# Altium PCB Clock_Board v2.PcbDoc
Units mm, origin at the board's own origin, x right, y up, seen from the top; angles counter-clockwise.
Board outline 111.25 x 61.62 mm, 2 copper layers (Top Layer, Bottom Layer); 59 components, 69 nets, 267 pads, 0 vias.
Unrouted connection lines stored in the file: 4.
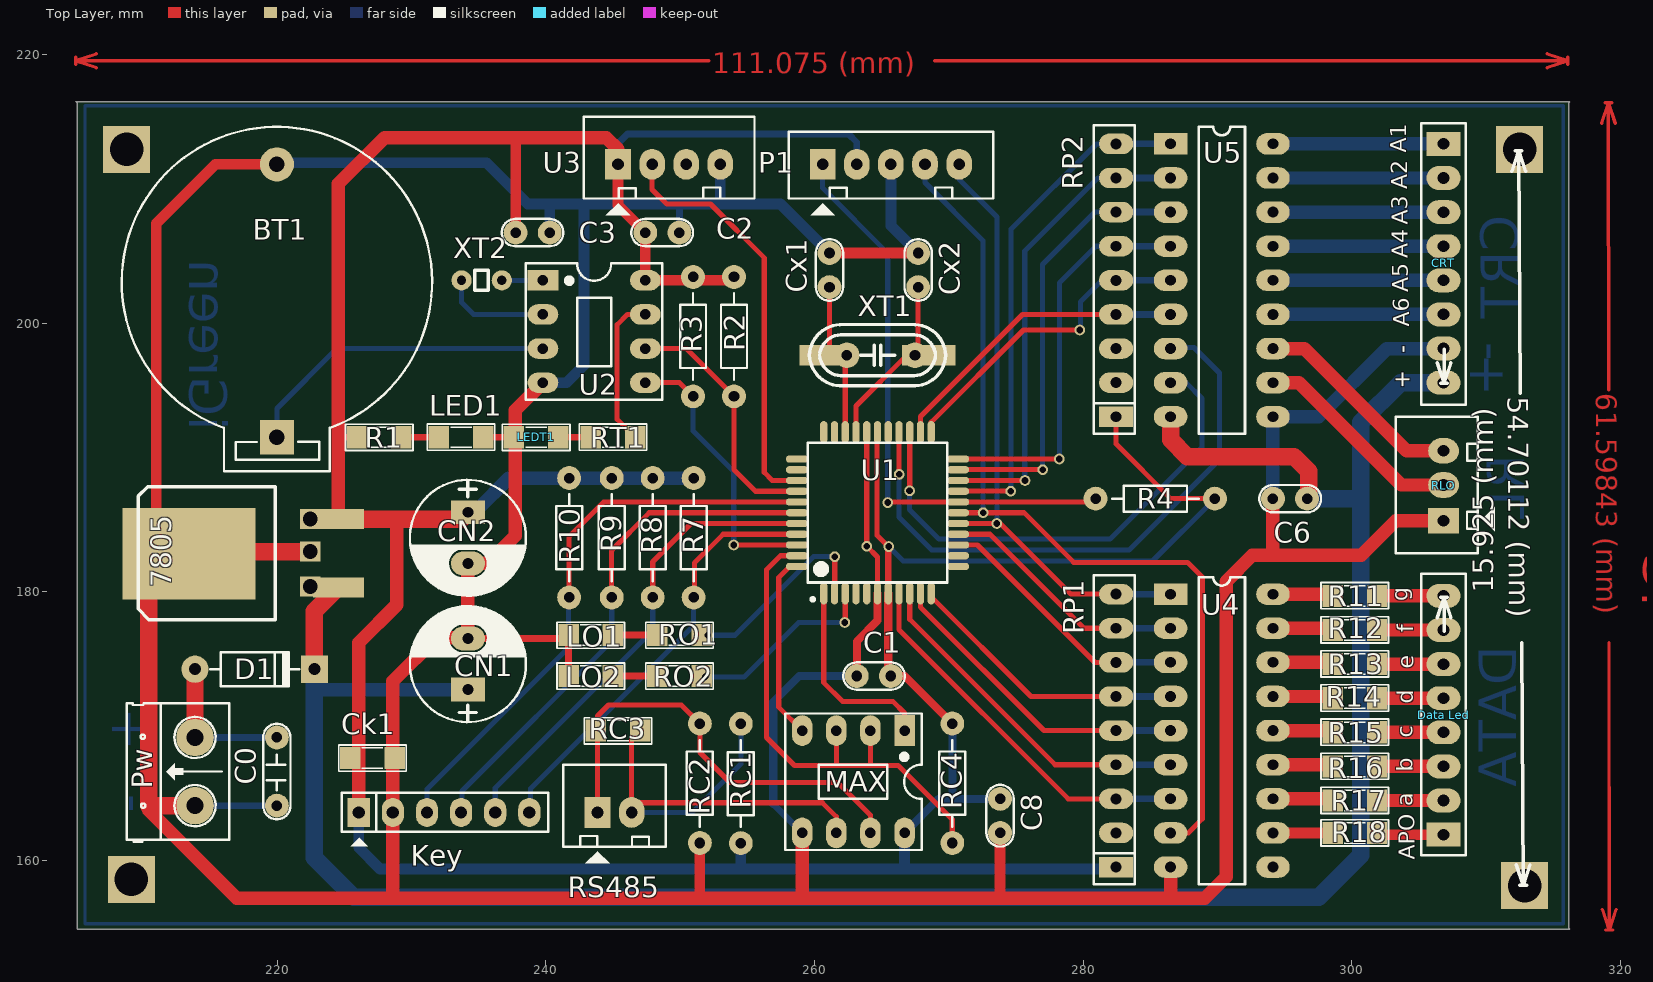
[diagram p0: Top Layer view]
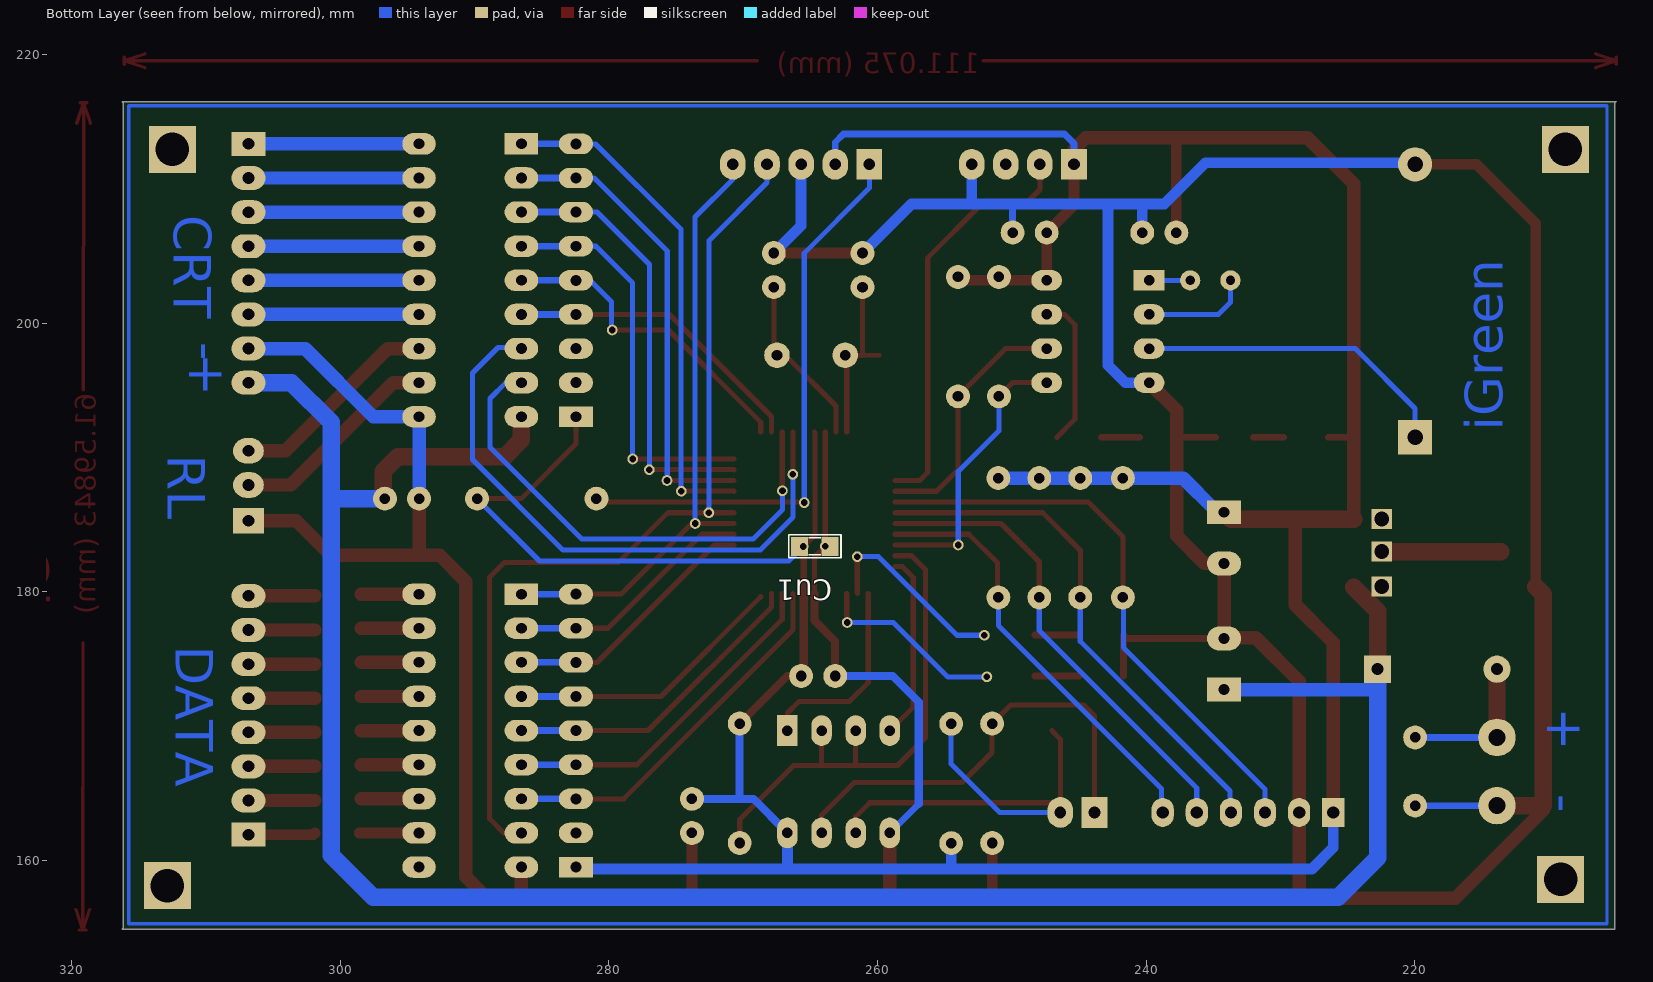
[diagram p1: Bottom Layer view, seen from below]
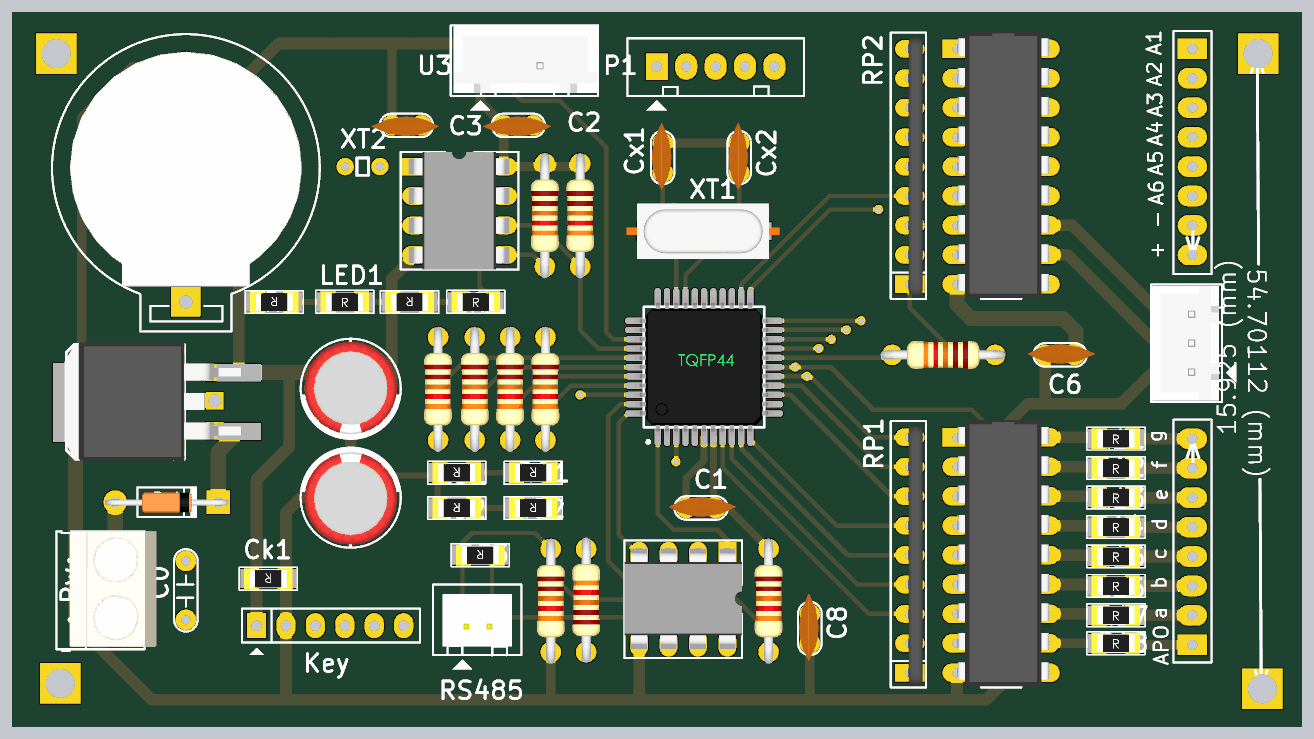
[diagram p2: 3D render of the assembled board from above, using the file's embedded part models]

## Layer stack, top to bottom
Top Layer: signal copper 0.0356
Dielectric: core 0.32, FR-4, Dk 4.8
Bottom Layer: signal copper 0.0356

## Board outline
205.25,216.5 316.25,216.5 316.175,216.425 316.175,177.875 316.175,154.95 316.25,154.875 303.25,154.875 205.1,154.875 205.1,174.85 205.1,216.4 205,216.5 206.525,216.5

## Design rules (kind name [scope] priority, off if disabled: settings)
AssemblyTestPointUsage AssemblyTestPointUsage_1 [All] p2:
AssemblyTestpoint AssemblyTestpoint_1 [All] p2: testpointundercomponent=TRUE minsize=1.016 maxsize=2.54 preferedsize=1.524 minholesize=0 maxholesize=1.016 preferedholesize=0.813 testpointgrid=0.025 usegrid=TRUE gridtolerance=0 allowsidetop=TRUE allowsidebottom=TRUE
Clearance [All] p1: gap=0.2
ComponentClearance ComponentClearance_1 [All] p2: gap=0.254 collisioncheckmode=3 verticalgap=0.254 showdistances=FALSE
DiffPairsRouting DiffPairsRouting_1 [All] p2: maxlimit=0.254 minlimit=0.254 mostfreqgap=0.254 maxuncoupledlength=12.7
FabricationTestPointUsage TestPointUsage [All] p2: valid=0 allowmultiple=FALSE
FabricationTestpoint Testpoint [All] p2: side=3 testpointundercomponent=TRUE minsize=1.016 maxsize=2.54 preferedsize=1.524 minholesize=0 maxholesize=1.016 preferedholesize=0.813 testpointgrid=0.025 allowsidetop=TRUE allowsidebottom=TRUE usegrid=TRUE gridtolerance=0
FanoutControl Fanout_LCC [IsLCC] p1: bgadir=Out bgaviamode=Centered fanoutstyle=Auto fanoutdirection=Alternating viagrid=0.025 // Fanout_LCC (Default Rule)
FanoutControl Fanout_BGA [IsBGA] p2: bgadir=Out bgaviamode=Centered fanoutstyle=Auto fanoutdirection=Alternating viagrid=0.025 // Fanout_BGA (Default Rule)
FanoutControl Fanout_Small [(CompPinCount < 5)] p3: bgadir=Out bgaviamode=Centered fanoutstyle=Auto fanoutdirection=OutThenIn viagrid=0.025 // Fanout_Small (Default Rule)
FanoutControl Fanout_SOIC [IsSOIC] p4: bgadir=Out bgaviamode=Centered fanoutstyle=Auto fanoutdirection=Alternating viagrid=0.025 // Fanout_SOIC (Default Rule)
FanoutControl Fanout_BGA_1 [IsBGA] p6: bgadir=Out bgaviamode=Centered fanoutstyle=Auto fanoutdirection=Alternating viagrid=0.025 // Fanout_BGA (Default Rule)
FanoutControl Fanout_LCC_1 [IsLCC] p7: bgadir=Out bgaviamode=Centered fanoutstyle=Auto fanoutdirection=Alternating viagrid=0.025 // Fanout_LCC (Default Rule)
FanoutControl Fanout_SOIC_1 [IsSOIC] p8: bgadir=Out bgaviamode=Centered fanoutstyle=Auto fanoutdirection=Alternating viagrid=0.025 // Fanout_SOIC (Default Rule)
FanoutControl Fanout_Small_1 [(CompPinCount < 5)] p9: bgadir=Out bgaviamode=Centered fanoutstyle=Auto fanoutdirection=OutThenIn viagrid=0.025 // Fanout_Small (Default Rule)
FanoutControl Fanout_Default_1 [All] p10: bgadir=Out bgaviamode=Centered fanoutstyle=Auto fanoutdirection=Alternating viagrid=0.025 // Fanout_Default (Default Rule)
Height Height_1 [All] p2: minheight=0 maxheight=25.4 prefheight=12.7
HoleSize HoleSize_1 [All] p2: absolutevalues=TRUE maxlimit=2.54 minlimit=0.025 maxpercent=80.000 minpercent=20.000
HoleToHoleClearance HoleToHoleClearance_1 [All] p2: gap=0.254 allowstackedmicrovias=TRUE
LayerPairs LayerPairs_1 [All] p2: enforce=TRUE
MinimumSolderMaskSliver MinimumSolderMaskSliver_1 [All] p2: minsoldermaskwidth=0.254
NetAntennae NetAntennae_1 [All] p2: netantennaetolerance=0
PasteMaskExpansion PasteMaskExpansion_1 [All] p2: expansion=0
PlaneClearance PlaneClearance_1 [All] p2: clearance=0.508
PolygonConnect [All] p1: connectstyle=Relief reliefconductorwidth=0.254 reliefentries=4 polygonreliefangle="90 Angle"
PolygonConnect PolygonConnect_1 [All] p2: connectstyle=Relief reliefconductorwidth=0.254 reliefentries=4 polygonreliefangle="90 Angle"
RoutingPriority RoutingPriority_1 [All] p2: routingpriority=0
RoutingTopology RoutingTopology_1 [All] p2: topology=Shortest
RoutingVias [All] p1: holewidth=0.6 width=1 viastyle="Through Hole" minholewidth=0.711 minwidth=1.27 maxholewidth=0.711 maxwidth=1.27
ShortCircuit ShortCircuit_1 [All] p2: allowed=FALSE
SilkToSilkClearance SilkToSilkClearance_1 [All] p2: silktosilkclearance=0.254
SilkscreenOverComponentPads [All] p1: minsilkscreentomaskgap=0.254
SilkscreenOverComponentPads SilkscreenOverComponentPads_1 [All] p2: minsilkscreentomaskgap=0.254
SolderMaskExpansion [All] p1: expansion=0.102
SolderMaskExpansion SolderMaskExpansion_1 [All] p2: expansion=0.102
UnRoutedNet UnRoutedNet_1 [All] p2:
Width [All] p1: maxlimit=3 minlimit=0.38 preferedwidth=0.38
23 further rules are at their usual default settings.

## Components (designator, comment, footprint, x,y, rotation, side; value= is the part's Value field where it differs from the comment)
7805 "Volt Reg" TO-263 224.536,180.34 r90 top
BT1 "PIN 3V" PIN3V 219.964,191.516 r90 top
C0 "104" CN2 219.964,164.084 r90 top
C1 "104" CN1 263.144,173.736 r0 top
C2 "104" CN1 249.936,206.756 r180 top
C3 "104" CN1 240.284,206.756 r180 top
C6 "104" CN1 294.132,186.944 r0 top
C8 "104" CN1 273.812,162.052 r90 top
Ck1 "100pF" SM-1206 227.076,167.64 r180 top
CN1 "100uF/35V" CP1.5/3.4 234.188,172.72 r90 top
CN2 "100uF/35V" CP1.5/3.4 234.188,185.928 r270 top
CRT "HD8" HED8 306.832,213.36 r270 top
Cu1 "33pF" SM-0805 264.668,183.388 r0 bottom
Cx1 "22pF" CN1 261.112,202.692 r90 top
Cx2 "22pF" CN1 267.716,202.692 r90 top
D1 "Diode 1N4007" D1A 213.868,174.244 r180 top
"Data Led" "HD8" HED8 306.832,161.925 r90 top
Key "JP6 PIN" JP6 226.06,163.576 r0 top
LED1 "LED" SM-1206 233.68,191.516 r0 top
LEDT1 "LED" SM-1206 239.268,191.516 r180 top
LO1 "LED" SM-1206 243.332,176.784 r180 top
LO2 "LED" SM-1206 243.332,173.736 r180 top
MAX "MAX485CSA" DIP8/W0.3 266.7,169.672 r180 top (schematic designator MAX485)
P1 "JP5" CON5 260.604,211.836 r0 top
Pw "Jack 12v" HED2 213.868,164.084 r90 top
R1 "1k" SM-1206 227.584,191.516 r180 top
R2 "4.7k" R1/4W 254,194.564 r90 top
R3 "4.7k" R1/4W 250.952,194.564 r90 top
R4 "10K" R1/4W 280.924,186.944 r0 top
R7 "10k" R1/4W 250.996,179.586 r90 top
R8 "10k" R1/4W 247.948,179.586 r90 top
R9 "10k" R1/4W 244.9,179.586 r90 top
R10 "10k" R1/4W 241.727,179.586 r90 top
R11 "220R" SM-1206 300.228,179.705 r0 top
R12 "220R" SM-1206 300.228,177.165 r0 top
R13 "220R" SM-1206 300.228,174.625 r0 top
R14 "220R" SM-1206 300.228,172.085 r0 top
R15 "220R" SM-1206 300.228,169.545 r0 top
R16 "220R" SM-1206 300.228,167.005 r0 top
R17 "220R" SM-1206 300.228,164.465 r0 top
R18 "220R" SM-1206 300.228,162.052 r0 top
RC1 "560R" R1/4W 254.508,170.18 r270 top
RC2 "560R" R1/4W 251.46,161.305 r90 top
RC3 "120R" SM-1206 245.364,169.672 r180 top
RC4 "10K" R1/4W 270.256,161.305 r90 top
RLO "JP3" CON3 306.832,185.42 r90 top
RO1 "1k" SM-1206 249.936,176.784 r180 top
RO2 "1k" SM-1206 249.936,173.736 r180 top
RP1 "10K" RN8 282.448,159.512 r90 top
RP2 "10K" RN8 282.448,193.04 r90 top
RS485 "Header 2" CON2 243.84,163.576 r0 top
RT1 "470" SM-1206 244.983,191.516 r0 top
U1 "PIC887-TQFL" TQFP-44 264.668,185.928 r90 top
U2 "DS1307" DIP8/W0.3 239.776,203.2 r270 top
U3 "DHT11" CON4 245.364,211.836 r0 top
U4 "ULN2803" ULN2803 286.512,179.832 r0 top
U5 "TD62783" ULN2803 286.512,213.36 r0 top
XT1 "12MHz" Xtal_SMD 267.208,197.612 r0 top
XT2 "32.768kHz" tu_gom 235.712,203.2 r0 top

## Footprints (in the part's own frame and the unit in brackets; to place one, negate y for a bottom-side part, rotate by r counter-clockwise, add the part's x,y. Pads: shape width x height; smd on the part's side, far side on the other; paste and mask are expansions set on the pad)
CN1 [mil]
  round 70 hole 31: 1(0,0) 2(100,0)
  silkscreen extent -40,-40 141,40, body extent -60,-30 170,37, height 265
CN2 [mil]
  round 70 hole 31: 1(0,0) 2(200,0)
  silkscreen extent -40,-40 240,40
CON2 [mil] "CON2"
  rect 75x90 hole 34: 1(0,0)
  oval 75x90 hole 34: 2(100,0)
  silkscreen extent -100,-150 200,140, body extent -68,-70 168,107, height 236
CON3 [mil] "CON 3"
  rect 75x90 hole 34: 1(-5,0)
  oval 75x90 hole 34: 2(100,0) 3(200,0)
  silkscreen extent -100,-150 300,140, body extent -95,-90 295,136, height 276
CON4 [mil] "CON4"
  rect 75x90 hole 34: 1(0,0)
  oval 75x90 hole 34: 2(100,0) 3(200,0) 4(300,0)
  silkscreen extent -100,-150 400,140, body extent -90,-90 398,136, height 276
CON5 [mil] "CON5"
  rect 75x90 hole 34: 1(0,0)
  oval 75x90 hole 34: 2(100,0) 3(200,0) 4(300,0) 5(400,0)
  silkscreen extent -100,-150 500,96
CP1.5/3.4 [mil] "Tu hoa 220->470uF,16V, 470uF/16V,25V"
  rect 70x100 hole 32: 1(0,0)
  oval 70x100 hole 32: 2(150,0)
  silkscreen extent -95,-170 245,170, body extent -85,-157 230,157, height 446
D1A [mil] "Diode 1A, W 100mil, L 350mil"
  round 80 hole 35: 1(0,0)
  rect 80x80 hole 35: 2(-350,0)
  silkscreen extent -305,-50 -45,50, body extent -386,-33 34,36, height 84
DIP8/W0.3 [mil] "8 PIN, W 300mil, Pin to pin 100mil"
  rect 60x90 hole 31: 1(0,0)
  oval 60x90 hole 31: 2(100,0) 3(200,0) 4(300,0) 5(300,300) 6(200,300) 7(100,300) 8(0,300)
  silkscreen extent -50,-50 350,350, body extent -50,-40 350,336, height 201
HED2 [mil] "Header 2, 2 pin, hight 300mil, Pin to Pin 200, Colour Green"
  round 110 hole 50: 1(0,0) 2(200,0)
  silkscreen extent -106,-100 300,200, body extent -92,-140 302,155, height 394
HED8 [mil] "CON8"
  rect 70x100 hole 34: 1(0,0)
  oval 70x100 hole 34: 2(100,0) 3(200,0) 4(300,0) 5(400,0) 6(500,0) 7(600,0) 8(700,0)
  silkscreen extent -60,-65 765,65
JP6 [mil] "JP6"
  rect 65x85 hole 36: 1(0,0)
  oval 65x85 hole 36: 2(100,0) 3(200,0) 4(300,0) 5(400,0) 6(500,0)
  silkscreen extent -50,-99 556,58
PIN3V [mil] "Socket PIN 3V"
  rect 100x100 hole 45: 1(0,0)
  round 100 hole 45: 2(800,0)
  silkscreen extent -100,-455 910,455, body extent 53,-394 850,394, height 207
R1/4W [mil] "R 1/4W, 2 Pin, 350mil"
  round 70 hole 31: 1(0,0) 2(350,0)
  silkscreen extent 48,-38 302,38, body extent -40,-47 386,47, height 111
RN8 [mil] "R SIP8, 9 Pin"
  rect 60x100 hole 32: 1(0,0)
  oval 60x100 hole 32: 2(100,0) 3(200,0) 4(300,0) 5(400,0) 6(500,0) 7(600,0) 8(700,0) 9(800,0)
  silkscreen extent -50,-55 855,65, body extent -43,-44 843,5, height 259
SM-0805 [mil] "Compoment SMD 80x50mil"
  rect 50x55 smd: 1(-45,0) 2(45,0)
  silkscreen extent -77,-34 76,33, body extent -40,-25 40,25, height 24
SM-1206 [mil] "Compoment SMD 120x60mil"
  rect 60x65 smd: 1(-65,0) 2(65,0)
  silkscreen extent -99,-38 99,39, body extent -83,-35 83,36, height 25
TO-263 [mm] "SMD-DPAK"
  rect 1.5x3.8 smd: 1(0,0) 3(5.08,0)
  rect 6.8x9.9 smd: 2(2.5,11.1)
  silkscreen extent -2.4,4.7 7.5,14.9, body extent -2.5,-0.23 7.66,15.03
TQFP-44 [mm] "IC dan 44 chan"
  oval 1.65x0.55 smd: 1(-6.034,3.982) 2(-6.034,3.182) 3(-6.034,2.382) 4(-6.034,1.582) 5(-6.034,0.782) 6(-6.034,-0.018) 7(-6.034,-0.818) 8(-6.034,-1.618) 9(-6.034,-2.418) 10(-6.034,-3.218) 11(-6.034,-4.018) 23(5.966,-4.018) 24(5.966,-3.218) 25(5.966,-2.418) 26(5.966,-1.618) 27(5.966,-0.818) 28(5.966,-0.018) 29(5.966,0.782) 30(5.966,1.582) 31(5.966,2.382) 32(5.966,3.182) 33(5.966,3.982)
  oval 0.55x1.65 smd: 12(-4.034,-6.018) 13(-3.234,-6.018) 14(-2.434,-6.018) 15(-1.634,-6.018) 16(-0.834,-6.018) 17(-0.034,-6.018) 18(0.766,-6.018) 19(1.566,-6.018) 20(2.366,-6.018) 21(3.166,-6.018) 22(3.966,-6.018) 34(3.966,5.982) 35(3.166,5.982) 36(2.366,5.982) 37(1.566,5.982) 38(0.766,5.982) 39(-0.034,5.982) 40(-0.834,5.982) 41(-1.634,5.982) 42(-2.434,5.982) 43(-3.234,5.982) 44(-4.034,5.982)
  silkscreen extent -6.61,-5.22 5.17,5.18, body extent -6.03,-6.01 5.97,5.99, height 1.07
tu_gom [mm]
  round 1.5 hole 0.7: 1(-2,0) 2(1,0)
  silkscreen extent -1,-0.75 0,0.75
ULN2803 [mm]
  rect 2.5x1.6 hole 0.8: 1(0,0)
  oval 2.5x1.6 hole 0.8: 2(0,-2.54) 3(0,-5.08) 4(0,-7.62) 5(0,-10.16) 6(0,-12.7) 7(0,-15.24) 8(0,-17.78) 9(0,-20.32) 10(7.62,-20.32) 11(7.62,-17.78) 12(7.62,-15.24) 13(7.62,-12.7) 14(7.62,-10.16) 15(7.62,-7.62) 16(7.62,-5.08) 17(7.62,-2.54) 18(7.62,0)
  silkscreen extent 2.08,-21.59 5.54,1.27, body extent 0.06,-21.5 7.94,1.49, height 5.08
Xtal_SMD [mm] "Xtal Dan"
  rect 4x1.524 smd: 1(1.29,0.01) 2(-6.33,0.01)
  silkscreen extent -7.6,-2.28 2.56,2.3, body extent -9.2,-2.4 4,2.4, height 4.3

## Part data
7805: "Voltage Regulator"
BT1: "Battery 3VDC"
C0 C1 C2 C3 C6: library part CN2, "Cap np 104 => 105pF"
C8 Ck1: library part CN1, "Cap np  1pF - 472pF"
CN1 CN2: library part CP3, "Cap 100uF/35V - 470uF/16V"
CRT "Data Led": library part Hed8, "Hedear 8"
Cu1 Cx1 Cx2: library part CN0, "Cremic For Xtal 1pF => 100pF"
D1: "1 Amp General Purpose Rectifier"
Key: library part JP6
LED1 LEDT1 LO1 LO2: "LED Single colour Green and Red"
MAX: "Low-Power, Slew-Rate-Limited RS-485/RS-422 Transceiver"
P1: library part Con5, "Connector 5"
Pw: library part Hed2, "Header 2 (Green)"
R1 R2 R3 R4 R7 R8 R9 R10 R11 R12 R13 R14 R15 R16 R17 R18 RC1 RC2 RC3 RC4 RO1 RO2 RT1: library part R1/4W, "Resistor 1/4W"
RLO: library part Con3, "Connector 3"
RP1 RP2: library part "Header 9", "Header, 9-Pin"
RS485: "Header, 2-Pin"
U1: library part PIC16F887-TQFL, "16F887_TQFP"
U2: "64 X 8 Serial Real-Time Clock"
U3: "Sensor Ther"
U4: library part "ULN 2803"
U5: library part TD62783AF
XT1 XT2: library part XTAL, "Crystal Oscillator"

## Free pads (board coordinates)
  rect 1.5x1.5 hole 1.1: 0(222.45,185.425) 1(222.45,180.4) 2(222.45,183)
  round 0.8 hole 0.5: 0(251.85,173.675) 0(272.55,185.9) 1(252.036,176.773) 3(276.987,189.103) 3(278.228,189.894) 4(275.67,188.294) 5(274.6,187.5) 6(273.575,185.094) 7(266.3,188.75) 8(267.075,187.525) 9(265.45,186.65) 10(261.5,182.625) 11(262.25,177.725) 12(253.981,183.494) 13(265.525,183.375) 14(263.886,183.4) 15(279.75,199.5)
  round 1.9 hole 0.8: 2(262.402,197.622) 3(267.482,197.622)
  rect 3.5x3.5 hole 2.5: 8(208.775,212.95) 9(209.125,158.6) 10(312.875,158.125) 11(312.5,212.95)

## Nets (pads, with @x,y where several pads share a name; then routed paths per layer and width w, separated by ;. In a path a pad name is that pad's centre, name@x,y a point inside that pad or via, vN(x,y) a via of type N, cw(c..) or ccw(c..) an arc to the next point about the centre after c; other vN are vias at no path point)
+12V: 7805.1 C6.2 CN1.1 CRT.8 D1.2 pad.1@222.45,180.4 U5.9 | length 171.5
  Top Layer w1: C6.2 C6.2@296.8,187.072
  Top Layer w1.3: D1.2 222.758,178.562 7805.1 ; U5.9 286.512,191.313 287.75,190.075 295.7,190.075 296.8,188.975 C6.2@296.8,187.072
  Bottom Layer w1: 222.758,172.725 222.763,172.72 CN1.1 ; 300.469,186.944 300.675,187.15
  Bottom Layer w1.3: D1.2 222.758,172.725 222.758,160.217 225.7,157.275 297.55,157.275 300.675,160.4 300.675,187.15 300.675,192.625 303.63,195.58 CRT.8 ; C6.2 300.469,186.944
A1: CRT.1 U5.18 | length 12.7
  Bottom Layer w1: U5.18 CRT.1
A2: CRT.2 U5.17 | length 12.7
  Bottom Layer w1: U5.17 CRT.2
A3: CRT.3 U5.16 | length 12.7
  Bottom Layer w1: U5.16 CRT.3
A4: CRT.4 U5.15 | length 12.7
  Bottom Layer w1: U5.15 CRT.4
A5: CRT.5 U5.14 | length 12.7
  Bottom Layer w1: U5.14 CRT.5
A6: CRT.6 U5.13 | length 12.7
  Bottom Layer w1: U5.13 CRT.6
ANODE1: pad.5 RP2.9 U1.19 U5.1 | length 37.9
  Top Layer w0.38: U1.19 270.692,187.5 pad.5
  Bottom Layer w0.38: pad.5@274.625,187.5 274.625,207 280.985,213.36 RP2.9
  Bottom Layer w0.5: RP2.9 U5.1
ANODE2: pad.4 RP2.8 U1.20 U5.2 | length 35.2
  Top Layer w0.38: U1.20 pad.4
  Bottom Layer w0.38: pad.4 275.65,188.314 275.65,205.375 281.095,210.82 RP2.8
  Bottom Layer w0.5: RP2.8 U5.2
ANODE3: pad.3@276.987,189.103 RP2.7 U1.21 U5.3 | length 32.7
  Top Layer w0.3: pad.3@276.978,189.094 pad.3@276.987,189.103
  Top Layer w0.38: U1.21 270.695,189.103 pad.3@276.987,189.103
  Bottom Layer w0.38: pad.3@276.987,189.103 276.975,189.115 276.975,204.375 280.88,208.28 RP2.7
  Bottom Layer w0.5: RP2.7 U5.3
ANODE4: pad.3@278.228,189.894 RP2.6 U1.22 U5.4 | length 30.1
  Top Layer w0.38: U1.22 pad.3@278.228,189.894
  Bottom Layer w0.38: pad.3@278.228,189.894 278.228,203.003 280.965,205.74 RP2.6
  Bottom Layer w0.5: RP2.6 U5.4
ANODE5: pad.15 RP2.5 U1.23 U5.5 | length 24.8
  Top Layer w0.3: U1.23 U1.23@268.686,192.536
  Top Layer w0.38: U1.23 268.686,192.636 275.55,199.5 pad.15
  Bottom Layer w0.38: pad.15 279.8,199.55 279.8,201.6 281.4,203.2 RP2.5
  Bottom Layer w0.5: RP2.5 U5.5
ANODE6: RP2.4 U1.24 U5.6 | length 24
  Top Layer w0.3: U1.24 267.886,192.936
  Top Layer w0.38: U1.24 267.886,193.061 275.485,200.66 RP2.4
  Bottom Layer w0.5: RP2.4 U5.6
APM: P1.4 pad.0@272.55,185.9 U1.17 U4.8 | length 68.7
  Top Layer w0.38: U1.17 275.606,185.894 279.3,182.2 287.777,182.2 288.875,181.102 288.875,163.1 287.827,162.052 U4.8
  Bottom Layer w0.38: P1.4 268.224,210.476 272.55,206.15 pad.0@272.55,185.9
APMO: "Data Led.1" R18.2 | length 5
  Top Layer w0.8: R18.2 302.006,161.925 306.832,161.925
DATA: U1.36 U3.2 | length 31
  Top Layer w0.38: U3.2 247.904,209.971 249,208.875 252.25,208.875 256.25,204.875 256.25,188.9 256.85,188.3 258.68,188.3 U1.36
DI: MAX.4 U1.44 | length 13.8
  Top Layer w0.38: U1.44 258.155,181.894 257.336,181.075 257.336,171.416 MAX.4
DOWN: Key.5 R8.1 U1.40 | length 35.5
  Top Layer w0.38: R8.1 247.948,182.202 247.925,182.225 250.794,185.094 U1.40
  Bottom Layer w0.38: Key.5 236.22,165.395 247.948,177.123 R8.1
EN: MAX.2 MAX.3 RC4.1 U1.43 | length 38.5
  Top Layer w0.38: U1.43 257.469,182.694 256.425,181.65 256.425,169.15 258.5,167.075 261.65,167.075 ; MAX.3 261.62,167.105 261.65,167.075 ; MAX.2 264.16,167.115 264.2,167.075 ; RC4.1 270.256,163.044 266.225,167.075 264.2,167.075 ; 261.65,167.075 264.2,167.075
GND: 7805.2 BT1.2 C0.1 C1.1 C2.1 C3.1 C6.1 C8.1 Ck1.1 CN1.2 CN2.2 CRT.7 Cu1.1 Cx1.2 Cx2.2 Key.2 LED1.2 LEDT1.2 LO1.2 LO2.2 MAX.5 P1.3 pad.2@222.45,183 pad.8@208.775,212.95 pad.9@209.125,158.6 pad.10@312.875,158.125 pad.11@312.5,212.95 pad.14 Pw.1 RC2.1 RLO.1 U1.6 U1.29 U2.4 U3.4 U4.9 U5.10 | length 413.2
  Top Layer w0.38: U1.29 pad.14 264.686,182.6 U1.6
  Top Layer w0.5: CN1.2 241.427,176.53 LO1.2 LO2.2 ; LED1.2@234.823,191.516 LEDT1.2@237.109,191.516 ; 251.3,157.2 251.46,157.36 ; 259.08,157.22 259.1,157.2 ; 273.725,157.2 273.812,157.287
  Top Layer w0.6: C1.1 263.144,176.319 264.686,177.861 U1.6
  Top Layer w0.8: 7805.2@210.975,180.379 210.975,207.425 215.386,211.836 BT1.2 ; 7805.2 7805.2@213.596,183 ; 251.46,157.36 RC2.1 ; Cx1.2 Cx2.2 ; 273.812,157.287 C8.1
  Top Layer w1: 210.425,164.075 210.425,163.75 216.975,157.2 228.55,157.2 ; CN2.2@234.188,181.61 CN1.2 234.118,176.6 231.85,176.6 228.6,173.35 Key.2 228.6,157.25 228.55,157.2 ; CN2.2 235.668,182.118 237.725,184.175 237.725,193.529 U2.4 ; 259.08,157.22 MAX.5 ; 286.512,157.45 U4.9 ; C6.1 294.132,182.807 294.05,182.725 ; RLO.1 303.268,185.293 300.7,182.725 294.05,182.725 ; 228.55,157.2 251.3,157.2 259.1,157.2 273.725,157.2 289.05,157.2 290.65,158.8 290.65,180.775 292.6,182.725 294.05,182.725
  Top Layer w1.3: 210.425,164.075 210.434,164.084 Pw.1 ; 210.425,164.084 210.425,179.829 7805.2@210.975,180.379 ; 7805.2@213.596,183 pad.2@222.35,183
  Bottom Layer w0.5: Pw.1 C0.1 ; BT1.2@220.025,212.405 BT1.2@220.48,211.95 ; C2.1 249.936,208.736 ; 256.925,164.207 MAX.5
  Bottom Layer w0.6: 256.925,164.207 256.925,171.8 258.861,173.736 C1.1
  Bottom Layer w0.8: BT1.2@220.48,211.95 235.575,211.95 238.65,208.875 257.469,208.875 Cx1.2 ; U2.4 241.53,195.58 242.825,196.875 242.825,208.875 ; C3.1 240.284,208.816 ; 252.984,208.909 U3.4 ; P1.3 265.684,207.264 Cx2.2
  Bottom Layer w1: C6.1 U5.10 297.54,193.04 302.62,198.12 CRT.7
ICSPCLK: P1.5 pad.6 RP1.9 U1.16 U4.1 | length 45.9
  Top Layer w0.38: U1.16 pad.6 273.831,185.094 279.093,179.832 RP1.9
  Bottom Layer w0.38: P1.5 270.764,210.732 273.575,207.921 pad.6
  Bottom Layer w0.5: RP1.9 U4.1
LED_A: RP1.3 U1.8 U4.7 | length 28.1
  Top Layer w0.38: U1.8 266.286,177.189 278.883,164.592 RP1.3
  Bottom Layer w0.5: RP1.3 U4.7
LED_B: RP1.4 U1.9 U4.6 | length 25.8
  Top Layer w0.38: U1.9 267.086,177.964 277.918,167.132 RP1.4
  Bottom Layer w0.5: RP1.4 U4.6
LED_C: RP1.5 U1.10 U4.5 | length 23.5
  Top Layer w0.38: U1.10 267.886,178.864 277.078,169.672 RP1.5
  Bottom Layer w0.5: RP1.5 U4.5
LED_D: RP1.6 U1.11 U4.4 | length 20.9
  Top Layer w0.38: U1.11@268.686,179.639 276.113,172.212 RP1.6
  Bottom Layer w0.5: RP1.6 U4.4
LED_E: RP1.7 U1.14 U4.3 | length 19.5
  Top Layer w0.3: RP1.7@282.4,174.752 RP1.7
  Top Layer w0.38: U1.14 272.131,183.494 280.873,174.752 RP1.7
  Bottom Layer w0.5: RP1.7 U4.3
LED_F: RP1.8 U1.15 U4.2 | length 18.7
  Top Layer w0.38: U1.15 273.056,184.294 280.058,177.292 RP1.8
  Bottom Layer w0.5: RP1.8 U4.2
LO1: pad.1@252.036,176.773 pad.10@261.5,182.625 RO1.1 U1.2 | length 14.6
  Top Layer w0.3: pad.10@261.486,182.611 pad.10@261.5,182.625
  Top Layer w0.38: U1.2 261.5,179.908 pad.10@261.5,182.625
  Bottom Layer w0.38: pad.1@252.036,176.773 254.073,176.773 259.925,182.625 pad.10@261.5,182.625
LO2: pad.0@251.85,173.675 pad.11@262.25,177.725 RO2.1 U1.3 | length 14.3
  Top Layer w0.3: pad.11@262.275,177.725 pad.11@262.286,177.736
  Top Layer w0.38: pad.11@262.286,177.736 U1.3
  Bottom Layer w0.38: pad.0@251.85,173.675 251.875,173.65 254.75,173.65 258.825,177.725 pad.11@262.25,177.725
MCLR: P1.1 pad.9@265.45,186.65 R4.1 U1.18 | length 42.8
  Top Layer w0.38: pad.9@265.45,186.65 265.494,186.694 U1.18 280.674,186.694 R4.1
  Bottom Layer w0.38: P1.1 260.604,210.071 265.45,205.225 pad.9@265.45,186.65
NetBT1_1: BT1.1 U2.3 | length 23.8
  Bottom Layer w0.38: BT1.1 219.964,193.664 224.42,198.12 U2.3
NetC0_2: C0.2 D1.1 Pw.2 | length 11.2
  Top Layer w1.3: Pw.2 D1.1
  Bottom Layer w0.5: Pw.2 C0.2
NetCx1_1: Cx1.1 pad.2@262.402,197.622 U1.31 XT1.2 | length 13.4
  Top Layer w0.3: XT1.2@259.862,197.622 XT1.2 261.15,197.622 261.975,197.622 XT1.2@262.286,197.622
  Top Layer w0.38: Cx1.1 261.112,197.66 XT1.2@261.15,197.622 ; XT1.2@261.975,197.622 262.286,197.311 U1.31
NetCx2_1: Cx2.1 pad.3@267.482,197.622 U1.30 XT1.1 | length 13.1
  Top Layer w0.3: XT1.1@266.872,197.622 XT1.1@267.482,197.622
  Top Layer w0.38: U1.30 263.086,193.836 XT1.1@266.872,197.622 ; XT1.1@267.482,197.622 267.716,197.856 Cx2.1
NetLED1_1: LED1.1 R1.1 | length 2.3
  Top Layer w0.5: R1.1@229.743,191.516 LED1.1@232.025,191.516
NetLEDT1_1: LEDT1.1 RT1.1 | length 2.9
  Top Layer w0.5: LEDT1.1@240.475,191.516 RT1.1
NetLO1_1: LO1.1 RO1.2 | length 3.3
  Top Layer w0.5: LO1.1 RO1.2
NetLO2_1: LO2.1 RO2.2 | length 3.3
  Top Layer w0.5: LO2.1 RO2.2
NetMAX_6: MAX.6 RC1.1 RC3.1 RS485.2 | length 37.2
  Top Layer w0.3: RS485.2@246.15,164.25 246.29,164.39 RS485.2@246.38,164.48
  Top Layer w0.38: RS485.2@246.29,164.39 RS485.2@246.38,164.3 ; RS485.2 RS485.2@246.38,164.3 ; RC3.1 246.38,169.037 246.38,164.48 RS485.2@246.38,164.3 ; MAX.6 261.62,163.255 260.575,164.3 RS485.2@246.38,164.3
  Bottom Layer w0.3: RS485.2@246.125,163.325 RS485.2@246.125,164.225
  Bottom Layer w0.38: RS485.2 250.901,163.576 254.508,167.183 RC1.1
NetMAX_7: MAX.7 RC2.2 RC3.2 RS485.1 | length 34
  Top Layer w0.3: RC2.2@251.46,170.434 RC2.2@251.46,170.64
  Top Layer w0.38: RS485.1 243.84,170.765 244.648,171.573 250.082,171.573 RC2.2 251.46,168.04 253.7,165.8 261.725,165.8 264.16,163.365 MAX.7
NetR11_1: R11.1 U4.18 | length 4.3
  Top Layer w1: U4.18 R11.1@298.45,179.832
NetR12_1: R12.1 U4.17 | length 4.3
  Top Layer w1: U4.17 R12.1@298.45,177.292
NetR13_1: R13.1 U4.16 | length 4.3
  Top Layer w1: U4.16 R13.1@298.45,174.752
NetR14_1: R14.1 U4.15 | length 4.3
  Top Layer w1: U4.15 R14.1@298.45,172.212
NetR15_1: R15.1 U4.14 | length 4.3
  Top Layer w1: U4.14 R15.1@298.45,169.672
NetR16_1: R16.1 U4.13 | length 4.3
  Top Layer w1: U4.13 R16.1@298.45,167.132
NetR17_1: R17.1 U4.12 | length 4.3
  Top Layer w1: U4.12 R17.1@298.45,164.592
NetR18_1: R18.1 U4.11 | length 4.4
  Top Layer w0.8: U4.11 R18.1
NetRLO_2: RLO.2 U5.11 | length 15.9
  Top Layer w1: U5.11 296.07,195.58 303.69,187.96 RLO.2
NetRLO_3: RLO.3 U5.12 | length 15.9
  Top Layer w1: U5.12 296.455,198.12 304.075,190.5 RLO.3
NetRT1_2: RT1.2 U2.7 | length 11.3
  Top Layer w0.38: RT1.2 245.3,192.85 245.3,199.9 246.06,200.66 U2.7
NetU2_1: U2.1 XT2.2 | length 3.1
  Bottom Layer w0.38: XT2.2 U2.1
NetU2_2: U2.2 XT2.1 | length 8.1
  Bottom Layer w0.38: XT2.1 233.712,201.563 234.615,200.66 U2.2
OUT_A: "Data Led.2" R17.2 | length 5
  Top Layer w1: R17.2 306.832,164.465
OUT_B: "Data Led.3" R16.2 | length 5
  Top Layer w1: R16.2 306.832,167.005
OUT_C: "Data Led.4" R15.2 | length 5
  Top Layer w1: R15.2 306.832,169.545
OUT_D: "Data Led.5" R14.2 | length 5
  Top Layer w1: R14.2 306.832,172.085
OUT_E: "Data Led.6" R13.2 | length 5
  Top Layer w1: R13.2 306.832,174.625
OUT_F: "Data Led.7" R12.2 | length 5
  Top Layer w1: R12.2 306.832,177.165
OUT_G: "Data Led.8" R11.2 | length 5
  Top Layer w1: R11.2 306.832,179.705
RL1: pad.8@267.075,187.525 U1.25 U5.8 | length 37.8
  Top Layer w0.38: pad.8@267.075,187.525 267.09,187.54 267.09,191.89 U1.25
  Bottom Layer w0.38: pad.8@267.075,187.525 267.075,186.125 269.275,183.925 282,183.925 288.85,190.775 288.85,194.4 287.67,195.58 U5.8
RL2: pad.7 U1.26 U5.7 | length 44.9
  Top Layer w0.38: U1.26 266.286,188.764 pad.7
  Bottom Layer w0.38: pad.7 266.285,188.735 266.285,185.565 268.725,183.125 283.425,183.125 290.15,189.85 290.15,196.3 288.25,198.2 286.592,198.2 U5.7
RO: MAX.1 U1.1 | length 14.9
  Top Layer w0.38: U1.1 260.686,173.239 262.075,171.85 265.825,171.85 266.7,170.975 MAX.1
SCL: R2.1 U1.37 U2.6 | length 18.9
  Top Layer w0.38: U2.6 250.444,198.12 R2.1 254,189.1 255.606,187.494 U1.37
SDA: pad.12 R3.1 U1.42 U2.5 | length 21
  Top Layer w0.3: pad.12@253.975,183.5 pad.12
  Top Layer w0.38: U2.5 249.936,195.58 R3.1 ; pad.12 U1.42
  Bottom Layer w0.38: R3.1 250.952,191.998 253.981,188.969 pad.12
SET: Key.6 R7.1 U1.41 | length 32.2
  Top Layer w0.38: R7.1 251.05,179.64 251.05,182.15 253.194,184.294 U1.41
  Bottom Layer w0.38: Key.6 238.85,163.666 238.85,165.35 250.996,177.496 R7.1
TIMER: Key.3 R10.1 U1.38 | length 43
  Top Layer w0.38: R10.1 241.727,184.127 244.294,186.694 U1.38
  Bottom Layer w0.38: Key.3 231.14,165.309 241.681,175.85 241.681,179.54 R10.1
UP: Key.4 R9.1 U1.39 | length 39.1
  Top Layer w0.38: R9.1 244.875,179.611 244.875,183.075 247.694,185.894 U1.39
  Bottom Layer w0.38: Key.4 233.75,163.646 233.75,165.175 244.9,176.325 R9.1
VCC: 7805.3 C1.2 C2.2 C3.2 C8.2 Ck1.2 CN2.1 Cu1.2 Key.1 MAX.8 P1.2 pad.0@222.45,185.425 pad.13 R1.2 R2.2 R3.2 R4.2 R7.2 R8.2 R9.2 R10.2 RC1.2 RC4.2 RP1.1 RP2.1 U1.7 U1.28 U2.8 U3.1 | length 285
  Top Layer w0.38: U1.28 264.66,191.868 264.66,184.201 pad.13@265.486,183.375 ; RP2.1 282.448,191.027 286.531,186.944 R4.2
  Top Layer w0.5: 224.536,191.65 224.67,191.516 R1.2@226.441,191.516 ; U1.7 pad.13@265.486,183.375
  Top Layer w0.6: C1.2@265.486,173.934 U1.7 ; C1.2 266.715,173.736 RC4.2
  Top Layer w0.8: C3.2 237.744,213.6 ; U3.1 245.364,208.788 C2.2 U2.8 R2.2@253.746,203.2
  Top Layer w1: 7805.3 224.536,191.65 224.536,210.386 227.975,213.825 244.5,213.825 U3.1@245.364,212.961 ; Key.1 226.06,176.21 228.875,179.025 228.875,185.42 ; CN2.1@233.68,185.42 CN2.1
  Top Layer w1.3: 7805.3 228.875,185.42 CN2.1@233.68,185.42
  Bottom Layer w0.38: pad.13 266.6,182.3 285.17,182.3 R4.2
  Bottom Layer w0.5: U3.1 245.364,213.389 246.064,214.089 262.536,214.089 263.144,213.481 P1.2 ; 270.256,164.761 270.425,164.592
  Bottom Layer w0.6: MAX.8 269.24,164.592 270.425,164.592 C8.2 ; 270.256,164.761 RC4.2
  Bottom Layer w0.8: Key.1 226.06,160.965 227.65,159.375 266.825,159.375 ; 254.4,159.375 254.508,159.483 RC1.2 ; MAX.8 266.7,159.5 266.825,159.375 ; RP1.1 282.311,159.375 266.825,159.375
  Bottom Layer w1: CN2.1@233.875,186.125 234.893,186.125 237.244,188.476 R10.2 R9.2 R8.2 R7.2
pads on no net: RP1.2 RP2.2 RP2.3 U1.4 U1.5 U1.12 U1.13 U1.27 U1.32 U1.33 U1.34 U1.35 U3.3 U4.10
copper on no net: | length 493.9
  Top Layer w0.254: 205,219.296 205,219.804 ; 206.524,219.042 205,219.55 ; 206.524,220.058 205,219.55 ; 252.133,219.55 205,219.55 ; 268.942,219.55 316.075,219.55 ; 314.551,219.042 316.075,219.55 ; 314.551,220.058 316.075,219.55 ; 316.075,219.296 316.075,219.804 ; 318.603,214.899 319.11,216.423 ; 318.665,156.348 319.175,154.825 ; 318.856,216.423 319.364,216.424 ; 318.921,154.825 319.429,154.825 ; 319.132,195.045 319.11,216.423 ; 319.152,176.204 319.175,154.825 ; 319.619,214.9 319.11,216.423 ; 319.681,156.35 319.175,154.825
  Bottom Layer w0.254: 205.675,155.3 205.675,216.2 315.75,216.2 315.75,155.3 205.675,155.3

## Other copper
Top Layer:
  text "111.075 (mm)" at 252.387,218.636 h1.52
  text "61.59843 (mm)" at 318.218,194.79 h1.52 r270.06
  text "iGreen" at 324.55,178.925 h2.8 r90
Bottom Layer:
  text "CRT" at 312.4,208.05 h2.8 r90
  text "-" at 311.25,197.225 h2.8 r90
  text "+" at 311.225,194.55 h2.8 r90
  text "iGreen" at 213.425,192 h2.8 r270
  text "RL" at 312.85,190.2 h2.8 r90
  text "DATA" at 312.25,175.975 h2.8 r90
  text "+" at 210.125,168.175 h2.8 r90
  text "-" at 210.15,163.55 h2.8 r90

## Silkscreen, mask and mechanical layers (free items; w line width, h text height)
Top Overlay:
  lines w0.254: 306.367,178.076 306.875,179.6 ; 306.367,197.049 306.875,195.525 ; 306.621,179.6 307.129,179.6 ; 306.621,195.525 307.129,195.525 ; 306.875,177.06 306.875,179.6 ; 306.875,198.065 306.875,195.525 ; 307.383,178.076 306.875,179.6 ; 307.383,197.049 306.875,195.525 ; 311.927,211.323 312.425,212.85 ; 312.171,212.848 312.679,212.852 ; 312.257,159.671 312.775,158.15 ; 312.521,158.148 313.029,158.152 ; 312.541,194.793 312.425,212.85 ; 312.659,176.207 312.775,158.15 ; 312.943,211.329 312.425,212.85 ; 313.273,159.677 312.775,158.15
  text "A1" at 304.075,212.7 h1.2 r90
  text "A2" at 304.125,210 h1.2 r90
  text "A3" at 304.175,207.35 h1.2 r90
  text "A4" at 304.175,204.85 h1.2 r90
  text "A5" at 304.225,202.3 h1.2 r90
  text "A6" at 304.275,199.75 h1.2 r90
  text "-" at 304.325,197.775 h1.2 r90
  text "+" at 304.325,195.125 h1.2 r90
  text "54.70112 (mm)" at 311.628,194.533 h1.52 r270.37
  text "15.925 (mm)" at 310.532,179.92 h1.52 r90
  text "g" at 304.175,179.3 h1.2 r90
  text "f" at 304.575,177 h1.2 r90
  text "e" at 304.625,174.275 h1.2 r90
  text "d" at 304.575,171.675 h1.2 r90
  text "c" at 304.525,169.15 h1.2 r90
  text "b" at 304.525,166.625 h1.2 r90
  text "a" at 304.55,164.025 h1.2 r90
  text "APO" at 304.7,160.05 h1.2 r90
Mechanical 16:
  drawing of 1882 lines, arcs and shapes, not listed
  text "1" at 24.037,278.511 h1.78
  text "2" at 73.076,278.511 h1.78
  text "3" at 122.335,278.511 h1.78
  text "4" at 171.628,278.511 h1.78
  text "5" at 220.904,278.511 h1.78
  text "6" at 269.926,278.511 h1.78
  text "7" at 319.456,278.511 h1.78
  text "8" at 368.478,278.511 h1.78
  text "A" at 1.905,244.526 h1.78
  text "A" at 390.525,244.526 h1.78
  text "B" at 1.905,173.914 h1.78
  text "B" at 390.525,173.914 h1.78
  text "C" at 1.905,103.302 h1.78
  text "C" at 329.057,76.759 h1.78
  text "D" at 1.905,33.198 h1.78
  text "D" at 390.525,33.198 h1.78
  text "ENGINEER:" at 275.59,33.02 h1.14
  text "TITLE:" at 313.69,33.02 h1.14
  text "PCB DESIGNER:" at 275.59,25.527 h1.14
  text "DATE:" at 275.59,17.78 h1.14
  text "PART NO.:" at 313.69,17.78 h1.14
  text "REV:" at 367.03,17.78 h1.14
  text "Altium Limited" at 242.57,15.24 h1.78
  text ".PRINT_DATE" at 276.86,14.732 h1.78
  text "12a Rodborough Rd" at 242.57,12.7 h1.78
  text "Frenchs Forest" at 242.57,10.16 h1.78
  text "FILE NAME:" at 275.59,10.16 h1.14
  text "DWG NO:" at 313.69,10.16 h1.14
  text "SCALE:" at 367.03,10.16 h1.14
  text "NSW 2086" at 242.57,7.62 h1.78
  text ".PCB_FILE_NAME_NO_PATH" at 276.86,7.112 h1.78
  text "1" at 24.037,1.651 h1.78
  text "2" at 73.076,1.651 h1.78
  text "3" at 122.335,1.651 h1.78
  text "4" at 171.628,1.651 h1.78
  text "5" at 220.904,1.651 h1.78
  text "6" at 269.926,1.651 h1.78
  text "7" at 319.456,1.651 h1.78
  text "8" at 368.478,1.651 h1.78